# Altium PCB Source_module.PcbDoc (part 2 of 2)
Units mil, origin at the board's own origin, x right, y up, seen from the top; angles counter-clockwise.
Board outline 3715 x 2515 mil, 2 copper layers (Top Layer, Bottom Layer); 125 components, 72 nets, 409 pads, 106 vias.
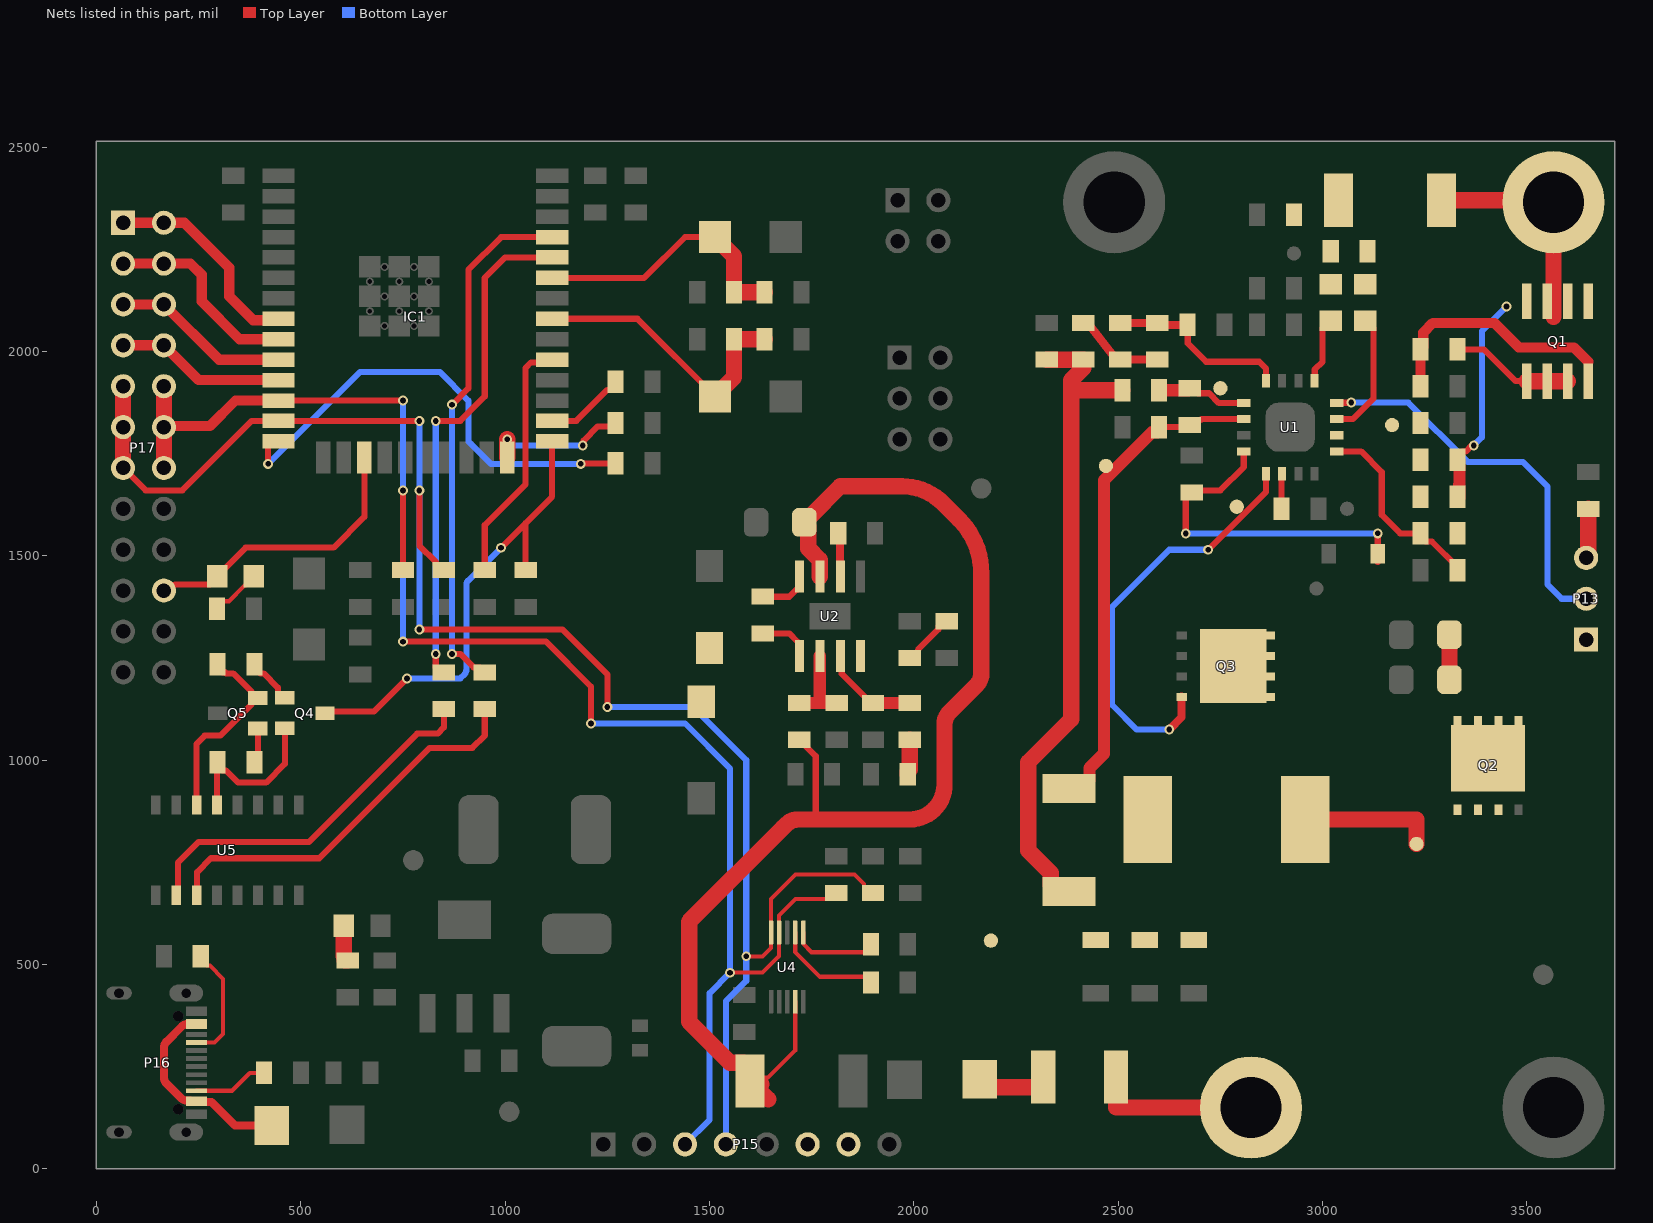
[diagram p2: the nets of this part, all layers, seen from the top]

## Via types
v1: diameter 24, hole 14, Top Layer to Bottom Layer, 75 vias
v2: diameter 50, hole 28, Top Layer to Bottom Layer, 31 vias

## Nets (pads, with @x,y where several pads share a name; then routed paths per layer and width w, separated by ;. In a path a pad name is that pad's centre, name@x,y a point inside that pad or via, vN(x,y) a via of type N, cw(c..) or ccw(c..) an arc to the next point about the centre after c; other vN are vias at no path point) (continued)
IN-: C21.2 P15.6 P15.7 R14.2 R15.1 U2.7 U4.9 | length 3089
  Top Layer w10: R14.2@1626.92,206.92 1626.92,221.06 1629.44,223.58 1643.58,223.58 1709.68,289.68 U4.9@1709.68,409.09 ; 1670,830 1672.5,827.5
  Top Layer w15: 1670,830 1670,843.28 ; R15.1@1720,1050 1760,1010 1760,855
  Top Layer w40: R14.2@1599.01,215 R14.2@1607.09,206.92 ; R14.2@1599.01,220.99 1599.01,244.53 1583.58,259.96 1550.04,259.96 1450,360 1450,605 1672.5,827.5 1688.28,843.28 cw(c1716.57,815) 1716.57,855 1760,855 1989.95,855 1990.07,855 ; R14.2@1626.92,206.92 R14.2@1607.09,206.92 ; 1644.01,170 R14.2@1607.09,206.92 ; U2.7@1770,1449 1770,1490 1741.99,1518.01 1741.99,1572 C21.2@1731.99,1582 1731.99,1587 1741.99,1597 1746.99,1597 1819.99,1670 1971.68,1670 cw(c1971.63,1529.08) 2071.23,1628.77 2110.23,1589.77 2110.32,1589.68 cw(c1977.77,1457.45) 2165,1457.45 2165,1457.36 2165,1211.57 cw(c2125,1211.57) 2157,1187.57 cw(c2125,1211.57) 2153.28,1183.28 2086.73,1116.73 ccw(c2115.04,1088.48) 2075.04,1088.48 2075.01,940.18 2075.01,940.09 cw(c1989.9,940.11) 1990.07,855
IO0: IC1.25 Q4.3 R27.2 | length 1155.4
  Top Layer w15: Q4.3@559.21,1115 559.21,1119.21 679.21,1119.21 v1(760,1200) ; v1(990,1520) 1050,1580 ; R27.2@1050,1465 1050,1580 ; IC1.25@1115,1780 1115,1645 1050,1580
  Bottom Layer w15: v1(760,1200) 890,1200 900.61,1210.61 ccw(c890,1221.21) 902,1212.21 ccw(c890,1221.21) 905,1221.21 905,1428.79 cw(c920,1428.79) 908,1437.79 cw(c920,1428.79) 909.29,1439.29 cw(c920.01,1428.79) 909.36,1439.36 v1(990,1520)
LED: IC1.17 LED.1 P17.20 | length 713.3
  Top Layer w15: P17.20@165,1415 176.92,1415 191.92,1430 277.5,1430 295,1447.5 LED.1@295,1450 295,1452.5 312.5,1470 315,1470 365,1520 580,1520 655.35,1595.35 IC1.17@655.35,1740.63
LODRV: P5.1 Q3.4 U1.13 | length 1034.6
  Top Layer w15: v1(2720,1515) 2861.94,1656.94 U1.13@2861.94,1700.51
  Top Layer w20: v1(2625,1075) 2655,1105 Q3.4@2655,1155
  Bottom Layer w15: v1(2625,1075) 2545,1075 2485,1135 2485,1375 2625,1515 v1(2720,1515)
MPPSET: C15.1 P11.1 R9.2 R11.1 U1.2 | length 3.3
  Top Layer w15: U1.2@3035,1795 U1.2@3037.34,1797.34
NetC1_2: C1.2 C2.2 Q1.1 Q1.2 Q1.3 Q2.5 Q2.6 Q2.7 Q2.8 Q2.9 R1.1 R2.1 | length 412.1
  Top Layer w15: R1.1@3330,2005 3395,2005 3472.44,1927.56 Q1.1@3500,1927.56
  Top Layer w40: C1.2@3310.49,1197 C2.2@3310.49,1307 ; Q1.1@3500,1927.56 Q1.2@3550,1927.56 Q1.3@3600,1927.56
NetC5_2: C5.2 R2.2 U1.1 | length 486
  Top Layer w15: U1.1@3035,1755.63 3094.37,1755.63 3145,1705 3145,1600 3190,1555 R2.2@3240,1555 3240,1547.19 3252.19,1535 3267.81,1535 3330,1472.81 C5.2@3330,1465
NetC6_2: C6.2 D1.1 U1.12 | length 842.1
  Top Layer w15: v1(2665.16,1554.84) 2665.16,1647.82 2677.34,1660 2750,1660 2807.22,1717.22 U1.12@2807.22,1755.63 ; D1.1@3135,1485 D1.1@3135,1505 v1(3135,1555)
  Bottom Layer w15: v1(2665.16,1554.84) 3134.84,1554.84 v1(3135,1555)
NetC12_1: C12.1 C13.2 D2.1 F1.1 P12.1 R4.1 R6.1 R8.1 | length 1786.6
  Top Layer w40: D2.1@2161,199 2161,200 F1.1@2316.42,200 ; C13.2@2325,1980 2345,1980 R8.1@2415,1980 ; R4.1@2380,679.02 2350.47,679.02 2335.04,694.46 2335.04,723.98 2280,779.02 2280,995 2385,1100 2385,1905 ; R8.1@2414.69,1979.68 2414.69,1959.68 2385,1930 2385,1905 ; R6.1@2510,1905 2385,1905
NetC16_2: C16.2 R10.2
NetC18_1: C18.1 R12.2 R13.1 U1.8 | length 459.2
  Top Layer w15: R13.1@2670,2065 2670,2020 2715,1975 2845,1975 2861.94,1958.06 U1.8@2861.94,1928.48
  Top Layer w20: C18.1@2505,2070 R12.2@2595,2070 2600,2065 R13.1@2670,2065
NetC18_2: C18.2 R8.2 R12.1 | length 221
  Top Layer w20: R8.2@2415,2070 2422.81,2070 2432.5,2060.31 2487.5,1989.69 C18.2@2505,1980 R12.1@2595,1980
NetC19_1: C19.1 U2.8 | length 126.7
  Top Layer w15: C19.1@1630,1400 1695,1400 1712.5,1417.5 1716.5,1417.5 1720,1421 U2.8@1720,1449
NetC19_2: C19.2 D5.2 L2.1 U2.1 | length 130.4
  Top Layer w15: C19.2@1630,1310 1695,1310 1716.5,1288.5 1716.5,1258.5 U2.1@1720,1255
NetC26_1: C26.1 R24.1 | length 87.1
  Top Layer w40: R24.1@1985,965 1985,972.18 1990,977.18 C26.1@1990,1050
NetC26_2: C26.2 C28.2 U2.3 | length 234.9
  Top Layer w15: U2.3@1820,1255 1823.5,1251.5 1823.5,1211.5 1880,1155 1880,1152.18 C28.2@1892.19,1140
  Top Layer w30: C28.2@1900,1140 C26.2@1990,1140
NetD3_1: D3.1 D4.1 R7.1
NetD3_2: D3.2 U1.3 | length 310.7
  Top Layer w15: U1.3@3035,1834.37 3074.37,1834.37 3125,1885 3125,2057.5 3107.5,2075 D3.2@3105,2075
NetD4_2: D4.2 U1.5 | length 164.5
  Top Layer w15: U1.5@2980.06,1928.48 2980.97,1929.39 2980.97,1955.97 3000,1975 3000,2057.5 3017.5,2075 D4.2@3020,2075
NetD6_1: D6.1 P16.A4_B9 P16.B4_A9 | length 495.6
  Top Layer w20: P16.A4_B9@245,354.49 222.77,354.49 ccw(c222.77,334.49) 208.66,348.66 170.82,310.82 ccw(c185,296.72) 169,308.72 ccw(c185,296.72) 165,296.72 165,223.28 ccw(c185,223.28) 169,211.28 ccw(c185,223.28) 170.82,209.18 206.85,173.15 ccw(c220.96,187.32) 220.96,167.32 229.41,167.32 P16.B4_A9@245,165.51 246.81,163.7 281.3,163.7 339,106 D6.1@429,106
NetIC1_14: IC1.14 R34.1 | length 1170.1
  Top Layer w15: v1(420,1725) 420,1769.78 430.22,1780 IC1.14@445.71,1780 ; v1(1185,1725) 1186,1726 R34.1@1270,1726
  Bottom Layer w15: v1(420,1725) 645,1950 840,1950 910,1880 910,1780 965,1725 v1(1185,1725)
NetIC1_24: IC1.24 R36.2 | length 344.4
  Top Layer w15: v1(1190,1770) 1191.72,1771.72 1191.72,1781.72 1226.6,1816.6 1261.6,1816.6 R36.2@1270,1825
  Top Layer w40: v1(1005,1785) 1005.35,1784.65 IC1.24@1005.35,1740.63
  Bottom Layer w15: v1(1005,1785) 1020,1770 v1(1190,1770)
NetIC1_26: IC1.26 R35.1 | length 199.3
  Top Layer w15: IC1.26@1115,1830 1174,1830 1250,1906 1257.81,1906 1270,1918.19 R35.1@1270,1926
NetIC1_29: IC1.29 R28.2 | length 609.7
  Top Layer w15: R28.2@950,1465 950,1575 1050,1675 1050,1960 1063.05,1973.05 1108.05,1973.05 IC1.29@1115,1980
NetLED_2: LED.2 R44.1 | length 127
  Top Layer w10: R44.1@295,1370 295,1374.14 309.68,1388.83 323.83,1388.83 362.5,1427.5 365,1427.5 385,1447.5 LED.2@385,1450
NetLED_S1_2: LED_S1.2 R21.1 | length 93.3
  Top Layer w40: LED_S1.2@605,595 605,520 607.5,517.5 607.5,510.32 607.81,510 R21.1@615,510
NetP13_2: P13.2 U1.4 | length 949.9
  Top Layer w15: U1.4@3035,1873.74 3035.75,1874.49 3069.49,1874.49 v1(3070,1875)
  Bottom Layer w15: v1(3070,1875) 3210,1875 3355,1730 3490,1730 3550,1670 3550,1430 3585,1395 P13.2@3645,1395
NetP13_3: P13.3 R5.1 | length 125
  Top Layer w40: P13.3@3645,1495 3650,1495 R5.1@3650,1615
NetP16_A5: P16.A5 R30.1 | length 291
  Top Layer w10: P16.A5@245,309.21 289.21,309.21 310,330 310,465 277.5,497.5 269.69,497.5 255,512.19 R30.1@255,520
NetP16_B5: P16.B5 R31.1 | length 183.2
  Top Layer w10: P16.B5@245,191.1 331.1,191.1 375,235 R31.1@410,235
NetQ1_4: Q1.4 R1.2 R3.1 | length 634.2
  Top Layer w10: Q1.4@3650,1927.56 3650,1975
  Top Layer w25: R3.1@3240,1915 R1.2@3240,2005 3246.21,2011.21 3246.21,2046.21 3270,2070 3420,2070 3480,2010 3615,2010 3650,1975
NetQ4_1: Q4.1 R40.1 | length 120.9
  Top Layer w15: R40.1@386.33,1235 386.33,1227.19 401.02,1212.5 408.83,1212.5 444.07,1177.26 444.07,1164.13 455.81,1152.4 Q4.1@460.79,1152.4
NetQ4_2: Q4.2 R41.2 U5.13 | length 393.5
  Top Layer w15: U5.13@295,890.24 295,993.67 R41.2@296.33,995 ; R41.2@296.33,987.19 308.52,975 316.33,975 346.33,945 415,945 461,991 Q4.2@461,1078
NetQ5_1: Q5.1 R41.1 | length 86.1
  Top Layer w15: R41.1@386.33,995 394.88,1003.55 Q5.1@394.88,1077.6
NetQ5_2: Q5.2 R40.2 U5.14 | length 484.3
  Top Layer w15: U5.14@245,890.24 245,1040 265,1060 302.66,1060 378.54,1135.88 378.54,1142.77 Q5.2@387.78,1152 ; R40.2@296.33,1235 296.33,1227.19 308.52,1215 314.8,1215 317.3,1212.5 334.16,1212.5 378.54,1168.12 378.54,1161.23 Q5.2@387.78,1152 ; Q5.2@394.66,1152 Q5.2@387.78,1152
NetR15_2: R15.2 R20.1 U2.2 | length 209.1
  Top Layer w30: R15.2@1720,1140 1760,1140 ; U2.2@1770,1255 1770,1150 1760,1140 ; R20.1@1810,1140 1760,1140
NetR19_2: R19.2 R22.1 U2.4 | length 136.4
  Top Layer w15: R22.1@1990,1250 1997.81,1250 2010,1262.18 2010,1270 2060,1320 2060,1327.81 2072.19,1340 R19.2@2080,1340
NetR23_1: R23.1 U2.6 | length 106.7
  Top Layer w20: R23.1@1815,1555 1819,1551 U2.6@1819,1450
NetR25_1: R25.1 U4.2 | length 267.6
  Top Layer w10: U4.2@1709.68,578.39 1709.68,530.32 1770,470 1880.31,470 1896.99,453.33 R25.1@1896.99,453.01
NetR26_1: R26.1 U4.1 | length 213.3
  Top Layer w10: U4.1@1729.37,578.39 1729.88,577.87 1729.88,550.12 1750,530 1880.31,530 1895,544.69 R26.1@1895,550
NetR38_2: R38.2 U5.2 | length 914
  Top Layer w15: U5.2@195,669.76 199.31,674.07 199.31,749.31 250,800 520,800 785,1065 835,1065 850,1080 R38.2@850,1125
NetR39_2: R39.2 U5.3 | length 964
  Top Layer w15: U5.3@245,669.76 246.01,670.77 246.01,726.01 280,760 545,760 815,1030 920,1030 950,1060 R39.2@950,1125
PH: C9.1 L1.1 P4.1 Q2.1 Q2.2 Q2.3 Q3.5 Q3.6 Q3.7 Q3.8 Q3.9 U1.14 | length 418.1
  Top Layer w15: C9.1@2900,1615 2900,1699.2 U1.14@2901.32,1700.51
  Top Layer w40: L1.1@2957.91,855 3230,855 P4.1@3230,795
RX_1: IC1.11 P17.7 P17.8 | length 415.9
  Top Layer w25: P17.7@65,2015 P17.8@165,2015 250,1930 IC1.11@445.71,1930
RX_2: IC1.9 P17.3 P17.4 | length 495.4
  Top Layer w25: P17.3@65,2215 P17.4@165,2215 230,2215 257.5,2187.5 257.5,2122.5 350,2030 IC1.9@445.71,2030
RXD: IC1.34 R38.1 | length 1248.4
  Top Layer w15: v1(830,1260) 830,1227.19 842.19,1215 R38.1@850,1215 ; v1(830,1830) 890,1830 950,1890 950,2180 1000,2230 IC1.34@1115,2230
  Bottom Layer w15: v1(830,1260) v1(830,1830)
SCL: IC1.13 P15.4 P17.9 P17.11 P17.13 R16.2 R29.2 U4.5 | length 4179.1
  Top Layer w10: v1(1590,520) 1630,520 1650.63,540.63 U4.5@1650.63,578.39 1650.63,660.63 1710,720 1855,720 1877.5,697.5 1877.5,689.69 1892.19,675 R16.2@1900,675
  Top Layer w15: P17.13@65,1715 120,1660 210,1660 380,1830 IC1.13@445.71,1830 v1(790,1830) ; v1(790,1320) 1140,1320 1250,1210 v1(1250,1130) ; v1(790,1660) 790,1525 830,1485 830,1477.18 842.18,1465 R29.2@850,1465
  Top Layer w40: P17.13@65,1715 P17.11@65,1815 P17.9@65,1915
  Bottom Layer w15: v1(790,1320) v1(790,1660) v1(790,1830) ; v1(1250,1130) 1460,1130 1590,1000 v1(1590,520) 1590,460 1540,410 P15.4@1540,60
SDA: IC1.12 P15.3 P17.10 P17.12 P17.14 R17.2 R37.2 U4.4 | length 3943
  Top Layer w10: v1(1550,480) 1630,480 1670.32,520.32 U4.4@1670.32,578.39 1670.32,620.32 1710,660 1781.64,660 1781.96,660.32 1787.5,660.32 1802.19,675 R17.2@1810,675
  Top Layer w15: IC1.12@445.71,1880 v1(750,1880) ; v1(750,1290) 1100,1290 1210,1180 v1(1210,1090) ; R37.2@750,1465 v1(750,1660)
  Top Layer w25: P17.12@165,1815 167.4,1817.4 277.4,1817.4 340,1880 IC1.12@445.71,1880
  Top Layer w40: P17.14@165,1715 P17.12@165,1815 P17.10@165,1915
  Bottom Layer w15: v1(750,1290) v1(750,1660) v1(750,1880) ; v1(1210,1090) 1440,1090 1550,980 v1(1550,480) 1500,430 1500,120 P15.3@1440,60
SRN: C14.1 P10.1 R6.2 U1.9 | length 209.3
  Top Layer w15: C14.1@2695,1897.82 2722.18,1897.82 2746.26,1873.74 U1.9@2807.22,1873.74
  Top Layer w30: R6.2@2600,1905 2672.18,1905 2677.19,1910 C14.1@2685,1910
SRP: C10.2 C11.2 C14.2 C17.2 L1.2 P9.1 R4.2 U1.10 | length 1169.3
  Top Layer w15: C17.2@2600,1815 2670,1815 C14.2@2675,1820 2687.19,1832.19 2701.6,1832.19 2703.79,1834.37 U1.10@2807.22,1834.37
  Top Layer w30: R4.2@2417.85,950.43 2428.96,950.43 2429.96,951.42 2429.96,980.95 2465,1015.99 2465,1685 2582.5,1802.5 2595.31,1802.5 2600,1807.19 C17.2@2600,1815
Touch1: C33.2 IC1.31 R42.2 S3.2 | length 711.4
  Top Layer w15: IC1.31@1115,2080 1323.39,2080 S3.2@1513.39,1890
  Top Layer w40: S3.2@1513.39,1890 1560,1936.61 R42.2@1560,2030 C33.2@1635,2030
Touch2: C32.2 IC1.33 R33.2 S2.2 | length 669.1
  Top Layer w15: IC1.33@1115,2180 1340,2180 1440,2280 S2.2@1513.39,2280
  Top Layer w40: S2.2@1513.39,2280 1560,2233.39 R33.2@1560,2145 C32.2@1635,2145
TS: P13.1
TX_1: IC1.10 P17.5 P17.6 | length 436.6
  Top Layer w25: P17.5@65,2115 P17.6@165,2115 300,1980 IC1.10@445.71,1980
TX_2: IC1.8 P17.1 P17.2 | length 521.9
  Top Layer w25: P17.1@65,2315 P17.2@165,2315 215,2315 325,2205 325,2135 383.48,2076.52 442.23,2076.52 IC1.8@445.71,2080
TXD: IC1.35 R39.1 | length 1293.3
  Top Layer w15: v1(870,1260) 890,1260 922.81,1227.19 937.81,1227.19 R39.1@950,1215 ; v1(870,1870) 910,1910 910,2200 990,2280 IC1.35@1115,2280
  Bottom Layer w15: v1(870,1260) v1(870,1870)
V_BATT: F1.2 VIT4.VIT1 | length 405
  Top Layer w40: F1.2@2495,225 2495,150 VIT4.VIT1@2825,150
V_SOLAR: C15.2 Q1.5 Q1.6 Q1.7 Q1.8 R7.2 R9.1 R10.1 VIT2.VIT1 | length 1081.5
  Top Layer w15: R9.1@3330,1735 3330,1742.81 3342.19,1755 3350,1755 3365,1770 v1(3370,1770)
  Top Layer w30: C15.2@3334.68,1641.91 3334.68,1674.76 3335,1675.07 3335,1722.19 3334.69,1722.5 R9.1@3334.69,1731.91
  Top Layer w40: R10.1@3290.98,2370 3565,2370 VIT2.VIT1@3565,2365 3565,2085
  Bottom Layer w15: v1(3370,1770) 3390,1790 3390,2050 v1(3450,2110)
pads on no net: IC1.4 IC1.5 IC1.6 IC1.7 IC1.18 IC1.19 IC1.20 IC1.21 IC1.22 IC1.23 IC1.27 IC1.28 IC1.30 IC1.32 IC1.36 IC1.37 P16. P16.A8 P16.B8 P17.16 U5.7 U5.8 U5.9 U5.10 U5.11 U5.12 U5.15

## Polygon pours and split planes (outlines as drawn)
HIDRV on Top Layer "NONET_L01_P-001" (solid, pour order 50): 2940,1490 2970,1490 3010,1450 3010,1320 2940,1320
IN- on Top Layer "NONET_L01_P-001" (solid, pour order 49): 1690,280 1694.39,284.39 ccw(c1668.79,310) 1705,310 1715,310 1715,302.52 cw(c1672.72,302.51) 1702.61,272.61 ccw(c1733.06,242.16) 1690,242.16 ccw(c1767.64,242.16) 1712.74,187.26 1733.79,166.21 ccw(c1845.36,277.78) 1845.36,120 1880,120 1880,25 1685,25 1685,110 ccw(c1645,110) 1645,150 1565,150 cw(c1565,175) 1540,175 1540,210.86 ccw(c1469.66,210.86) 1519.39,260.61 1500,280 1530,310 1535.86,304.14 ccw(c1594.14,362.43) 1594.14,280
GND on Top Layer "NONET_L01_P-001" (solid, pour order 46): 3250,650 3250,20 3690,20 3690,600 ccw(c3640,600) 3640,650
V_BATT on Top Layer "NONET_L01_P-001" (solid, pour order 45): 3210,650 2850,650 ccw(c2850,570) 2770,570 2770,390 cw(c2700,390) 2700,320 2460,320 ccw(c2460,300) 2440,300 2440,168.28 ccw(c2580.71,168.28) 2481.21,68.79 2495.86,54.14 ccw(c2578.28,136.57) 2578.28,20 3210,20
NetC1_2 on Top Layer "NONET_L01_P-001" (solid, pour order 7): 3620,1980 3470,1980 3434.14,2015.86 ccw(c3375.86,1957.58) 3375.86,2040 3320,2040 3320,1970 3345.86,1970 cw(c3345.86,1911.72) 3387.07,1952.93 cw(c3355.87,1921.72) 3400,1921.72 3400,1620 cw(c3370,1620) 3370,1590 3310,1590 3310,1530 3370,1530 3370,1420 3310.14,1360.14 3310.14,901.27 3560,901.27 3560,1750 3620,1810
MPPSET on Top Layer "NONET_L01_P-001" (solid, pour order 43): 3284.92,1849.88 3285.22,1849.58 3285.22,1603.55 3205.22,1603.55 3205.22,1650.27 ccw(c3088.65,1650.27) 3171.07,1732.69 3144.36,1759.41 ccw(c3086.07,1701.12) 3086.07,1783.55 3015.22,1783.55 3015.22,1808.55 3120.22,1808.55 3165.22,1853.55 3285.22,1853.55
V_SOLAR on Top Layer "NONET_L01_P-001" (solid, pour order 42): 3215.61,2189.39 3267.78,2137.22 ccw(c3333.49,2202.93) 3333.49,2110 3440,2110 3510,2040 3715,2040 3715,2215 3715,2470 3200,2470 ccw(c3200,2443.97) 3173.97,2443.97 3173.97,2280 3080,2280 3080,2215 3153.79,2215 cw(c3153.79,2127.57)
NetC12_1 on Top Layer "NONET_L01_P-001" (solid, pour order 41): 2405,1825 2405,1805 2365,1805 2365,1825 ccw(c2315,1825) 2315,1875 2305,1875 cw(c2305,1895) 2285,1895 2285,2005 2450,2005 2450,1959.14 ccw(c2472.07,1959.14) 2456.46,1943.54 ccw(c2477.07,1964.15) 2477.07,1935 2535,1935 2535,1875 2455,1875 ccw(c2455,1825)
NetC12_1 on Top Layer "NONET_L01_P-001" (solid, pour order 8): 2110,515 2110,523.79 cw(c2221.57,523.79) 2142.68,602.68 2222.32,682.32 ccw(c2131.36,773.28) 2260,773.28 2260,930 2300,930 2300,885 ccw(c2360,885) 2360,825 2455,825 cw(c2455.01,790.01) 2490,790 2490,500 2425,500 ccw(c2424.99,450.01) 2375,450 2375,105 2130,105 cw(c2130,125) 2110,125
LODRV on Top Layer "NONET_L01_P-001" (solid, pour order 40): 2870,1700.51 2870,1676.39 cw(c2806.29,1676.39) 2851.34,1631.34 2725,1505 2710,1505 2710,1525.86 cw(c2780.36,1525.86) 2730.61,1575.61 2855.51,1700.51
BTST on Top Layer "NONET_L01_P-001" (solid, pour order 39): 2978,1522.41 cw(c2997.31,1541.72) 2970,1541.72 2970,1720 3025.86,1720 cw(c3025.86,1661.72) 3067.07,1702.93 3087.93,1682.07 cw(c3058.79,1652.93) 3100,1652.93 3100,1612.07 cw(c3058.79,1612.07) 3087.93,1582.93 3027.41,1522.41
SRP on Top Layer "NONET_L01_P-001" (solid, pour order 36): 2450,1670 2450,1655 2475,1655 2475,1675 2565,1765 2525,1765 2518.54,1758.54 cw(c2497.93,1779.14) 2497.93,1750 2455,1750 2440,1735 2440,1694.14 ccw(c2462.07,1694.14) 2446.46,1678.54 cw(c2437.93,1670)
SRN on Top Layer "NONET_L01_P-001" (solid, pour order 35): 2685,1930 cw(c2721.21,1893.79) 2721.21,1945 2747.93,1945 cw(c2747.93,1903.79) 2777.07,1932.93 2792.93,1917.07 cw(c2758.44,1882.57) 2807.22,1882.57 2807.22,1865 2742.07,1865 cw(c2742.07,1894.14) 2721.46,1873.54 2713.54,1881.46 ccw(c2692.93,1860.87) 2692.93,1890 2685,1890
NetC16_2 on Top Layer "NONET_L01_P-001" (solid, pour order 34): 3080,2480 2895,2480 2895,2290 3085,2290 ccw(c3085,2310) 3105,2310 3105,2455 ccw(c3080,2455)
GND on Top Layer "NONET_L01_P-001" (solid, pour order 3): 2734.83,1780.83 2753.17,1799.17 cw(c2767.24,1785.1) 2767.24,1805 2825,1805 2825,1785 2782.62,1785 ccw(c2782.61,1770.47) 2772,1780.4 2759.33,1766.88 ccw(c2770.99,1755.94) 2755,1755.94 2755,1735 2725,1705 2669.52,1705 ccw(c2669.51,1668.14) 2632.65,1668.13 2632.65,1574.82 ccw(c2723.07,1574.8) 2659.14,1510.86 cw(c2596.8,1448.46) 2685,1448.43 2685,1185 2675,1175 2625,1175 2625,1115 2515,1115 2515,1616.72 cw(c2655.71,1616.72) 2556.21,1716.21 2590.86,1750.86 cw(c2649.13,1692.59) 2649.14,1775 2720.76,1775 ccw(c2720.76,1794.9)
GND on Top Layer "NONET_L01_P-001" (solid, pour order 32): 1765,1090 1945,1090 1945,885 1765,885
3V3 on Top Layer "NONET_L01_P-001" (solid, pour order 31): 1394,2280 1180,2280 1180,2385 1394,2385
3V3 on Top Layer "NONET_L01_P-001" (solid, pour order 28): 1245.86,1380 1210,1380 ccw(c1210,1360) 1190,1360 1190,1350 ccw(c1200,1350) 1200,1340 1255.86,1340 cw(c1255.86,1281.72) 1297.07,1322.93 1312.93,1307.07 cw(c1271.72,1265.86) 1330,1265.86 1330,1240 1370,1240 1370,1480 1330,1480 1330,1454.14 cw(c1271.72,1454.14) 1312.93,1412.93 1304.14,1404.14 cw(c1245.86,1462.42)
GND on Top Layer "NONET_L01_P-001" (solid, pour order 27): 1630,1830 1750,1830 ccw(c1750,1850) 1770,1850 1770,2340 ccw(c1750,2340) 1750,2360 1630,2360 ccw(c1630,2340) 1610,2340 1610,2264.14 ccw(c1668.28,2264.14) 1627.07,2222.93 1662.93,2187.07 cw(c1621.73,2145.86) 1680,2145.86 1680,2044.14 cw(c1597.59,2044.14) 1655.86,1985.86 1634.14,1964.14 ccw(c1692.42,1905.86) 1610,1905.86 1610,1850 ccw(c1630,1850)
GND on Top Layer "NONET_L01_P-001" (solid, pour order 26): 1320,1970 1420,1970 1420,1680 1320,1680
NetD3_1 on Top Layer "NONET_L01_P-001" (solid, remove dead copper, pour order 25): 2980,2260 2980,2130 3140,2130 3140,2200 3055,2200 3055,2280 3000,2280 ccw(c3000,2260)
3V3_BQ on Top Layer "NONET_L01_P-001" (solid, pour order 1): 2965,1895 2885,1895 2885,1940.86 cw(c2972.43,1940.86) 2892.19,1975.58 ccw(c2860.88,1989.13) 2895,1989.14 2895,2240 cw(c2930,2240) 2930,2275 cw(c2930,2240) 2965,2240
GND on Top Layer "NONET_L01_P-001" (solid, pour order 24): 1140,930 1250,930 cw(c1250,890) 1290,890 1290,540 cw(c1250,540) 1250,500 1100,500 cw(c1100,520) 1080,520 1080,870 cw(c1140,870)
GND on Top Layer "NONET_L01_P-001" (solid, pour order 21): 500,1800 580,1800 580,1640 540,1600 375,1600 375,1680 470,1680 500,1710
GND on Top Layer "NONET_L01_P-001" (solid, pour order 20): 160,610 160,695 130,695 130,610 cw(c105,610) 105,585 0,585 0,-5 275,-5 275,150 165,150 cw(c165,170) 145,170 145,345 cw(c170,345) 170,370 275,370 275,470 205,470 205,585 185,585 cw(c185,610)
GND on Top Layer "NONET_L01_P-001" (solid, pour order 16): 530,160 530,115 500,115 500,160 ccw(c475,160) 475,185 cw(c475,195) 465,195 465,285.5 cw(c536.2,285.51) 485.86,335.86 ccw(c427.59,394.13) 510,394.14 510,425 cw(c545,425) 545,460 812.93,460 cw(c812.95,430.91) 833.54,451.46 846.46,438.53 cw(c825.9,417.94) 855,417.93 855,320 ccw(c870,320) 870,305 915,305 915,235 735,235 cw(c735,250) 720,250 720,280 ccw(c705,280) 705,295 635,295 ccw(c635,280) 620,280 620,200 cw(c605,200) 605,185 555,185 ccw(c555,160)
SRP on Top Layer "NONET_L01_P-001" (solid, pour order 19): 2450,1170 2450,1116.21 cw(c2374.65,1116.21) 2427.93,1062.93 2359.14,994.14 ccw(c2417.42,935.86) 2335,935.86 2335,885 ccw(c2355,885) 2355,865 2445,865 cw(c2445,795) 2515,795 2515,500 2710,500 ccw(c2710,530) 2740,530 2740,885.15 ccw(c2595.51,885.15) 2697.68,987.32 ccw(c2618.79,908.44) 2618.79,1020 2525,1020 cw(c2525,1065) 2480,1065 2480,1170
IN+ on Top Layer "NONET_L01_P-001" (solid, pour order 18): 2055,135 2055,25 1895,25 1895,135 1840,135 cw(c1840,185) 1790,185 1790,270 cw(c1825,270) 1825,305 2025,305 cw(c2025,275) 2055,275
GND on Top Layer "NONET_L01_P-001" (solid, pour order 14): 545.61,2374.39 592.32,2327.68 cw(c513.45,2248.8) 625,2248.79 625,2040 ccw(c650,2040) 650,2015 845,2015 ccw(c845,2035) 865,2035 865,2183.79 cw(c990.71,2183.79) 901.82,2272.68 1012.93,2383.79 cw(c1076.21,2320.51) 1076.21,2410 1370,2410 1370,2460 ccw(c1330,2460) 1330,2500 200,2500 200,2400 483.79,2400 cw(c483.79,2312.59)
3V3 on Top Layer "NONET_L01_P-001" (solid, pour order 17): 865,325 930,325 ccw(c930,335) 940,335 940,450 cw(c995,450) 995,505 1020,505 ccw(c1020,535) 1050,535 1050,885 ccw(c1000,885) 1000,935 880,935 ccw(c880,715) 660,715 660,490 ccw(c680,490) 680,470 815,470 cw(c815,420) 865,420
5V-USB on Top Layer "NONET_L01_P-001" (solid, pour order 15): 1109.39,154.39 1064.14,109.14 cw(c993.79,179.5) 993.79,80 950,80 685,80 660,55 575,55 575,160 640,160 640,265 645,270 685,270 690,265 700,265 700,215 940,215 ccw(c940,235) 960,235 960,445 cw(c995,445) 995,480 1240,480 cw(c1240,440) 1280,440 1280,320 1355,320 cw(c1355,305) 1370,305 1370,211.21 cw(c1333.79,211.21) 1333.79,175 1159.14,175 ccw(c1159.14,104.65)
NetR19_2 on Top Layer "NONET_L01_P-001" (solid, pour order 11): 1850,1295 2030,1295 2030,1215 1850,1215
GND on Top Layer "NONET_L01_P-001" (solid, pour order 10): 1730,1305 1730,1395 1840,1395 1850,1405 1850,1605 1965,1605 cw(c1965,1540) 2030,1540 2030,1305
NetC19_2 on Top Layer "NONET_L01_P-001" (solid, pour order 12): 1542.07,1092.07 1642.93,1192.93 cw(c1679.31,1156.55) 1679.31,1208 1710,1208 1710,1345 1634.14,1345 cw(c1634.14,1403.28) 1592.93,1362.07 ccw(c1561.72,1330.87) 1561.72,1375 1430,1375 ccw(c1430,1335) 1390,1335 1390,1105 ccw(c1415,1105) 1415,1080 1512.93,1080 ccw(c1512.93,1121.21)
GND on Top Layer "NONET_L01_P-001" (solid, pour order 0): 2885,2385 2885,2480 2330,2480 ccw(c2330,2430) 2280,2430 2280,2040 2360,2040 2360,2130 2725,2130 2725,2025 ccw(c2755,2025) 2755,1995 2855,1995 ccw(c2855,2025) 2885,2025
GND on Top Layer "NONET_L01_P-001" (solid, pour order 2): 3003,1895 3003,1735 2843,1735 2843,1895
GND on Top Layer "NONET_L01_P-001" (solid, pour order 4): 3270.61,1405.61 ccw(c3247.93,1428.28) 3280,1428.28 3280,1490 ccw(c3270,1490) 3270,1500 3218.28,1500 ccw(c3218.28,1431.74) 3188.04,1492.94 ccw(c3202.38,1463.91) 3170,1463.91 cw(c3136.44,1463.9) 3160.17,1440.17 3133.28,1413.28 cw(c3065,1481.57) 3065,1385 ccw(c3065,1355) 3035,1355 3035,1110 3220,1110 ccw(c3220,1140) 3250,1140 3250,1355.86 cw(c3320.35,1355.86)
PH on Top Layer "NONET_L01_P-001" (solid, pour order 6): 2736.21,1043.79 cw(c2642.6,950.16) 2775,950.15 2775,800 ccw(c2860,800) 2860,715 3410,715 ccw(c3410,760) 3455,760 3455,905 3312.43,905 cw(c3312.43,1086.07) 3184.39,958.03 3022.78,1119.64 cw(c3258.85,1355.71) 2925,1355.71 2925,1600 2890,1600 2748.28,1458.28 ccw(c2876.92,1329.65) 2695,1329.64 2695,1143.28 ccw(c2835.71,1143.28)
GND on Bottom Layer "NONET_L01_P-001" (solid, remove dead copper, pour order 48): 0,2515 0,0 3715,0 3715,2515
GND on Bottom Layer "NONET_L01_P-001" (solid, pour order 29): 3265,1315 3265,1155 cw(c3225,1155) 3225,1115 2545,1115 2545,1355 3225,1355 cw(c3225,1315)

## Keep-outs
Keep-Out Layer:
  lines w19.68: 0,0 3715,0 3715,2515 0,2515 ; 0,0 0,2515 ; 0,0 0,2515

## Other copper
Bottom Layer:
  pour cut-out: 2140,2520 2140,1740 2225,1655 2225,1160 2130,1065 2130,875 2065,810 2065,665 2140,665 2230,755 2230,1020 2335,1125 2335,1755 2255,1835 2255,2520

## Silkscreen, mask and mechanical layers (free items; w line width, h text height)
Top Overlay:
  lines w5: 210,1465 240,1465 240,1565 210,1565 ; 220,1675 240,1675 240,2185 240,2345 220,2345 ; 220,1960 240,1960 ; 220,2165 240,2165
  text "TX_2" at 257,2262.83 h35
  text "RX_2" at 257,2162.83 h35
  text "TX_1" at 257,2062.83 h35
  text "RX_2" at 257,1962.83 h35
  text "SCL" at 262,1866.65 h35 r270
  text "SDA" at 322,1866.65 h35 r270
  text "GND" at 3492,1477 h35
  text "TS" at 3522,1252 h35
Bottom Overlay:
  lines w5: 110,1465 110,1565 210,1565 210,1465 110,1465
  text "ADC" at 325.3,1492 h35
  text "LED" at 325.3,1392 h35

## Text inside footprints (layer, text, board x,y; h text height)
IC1: Mechanical 13 "ANTENNA" at 544.13,2577.24 h70
P17: Top Overlay "24" at 145,1160 h50 r270; Top Overlay "23" at 45,1160 h50 r270; Top Overlay "2" at 145,2415 h50 r270; Top Overlay "1" at 45,2415 h50 r270